# EAGLE board 2r51 (EAGLE 3.55), part 1 of 3
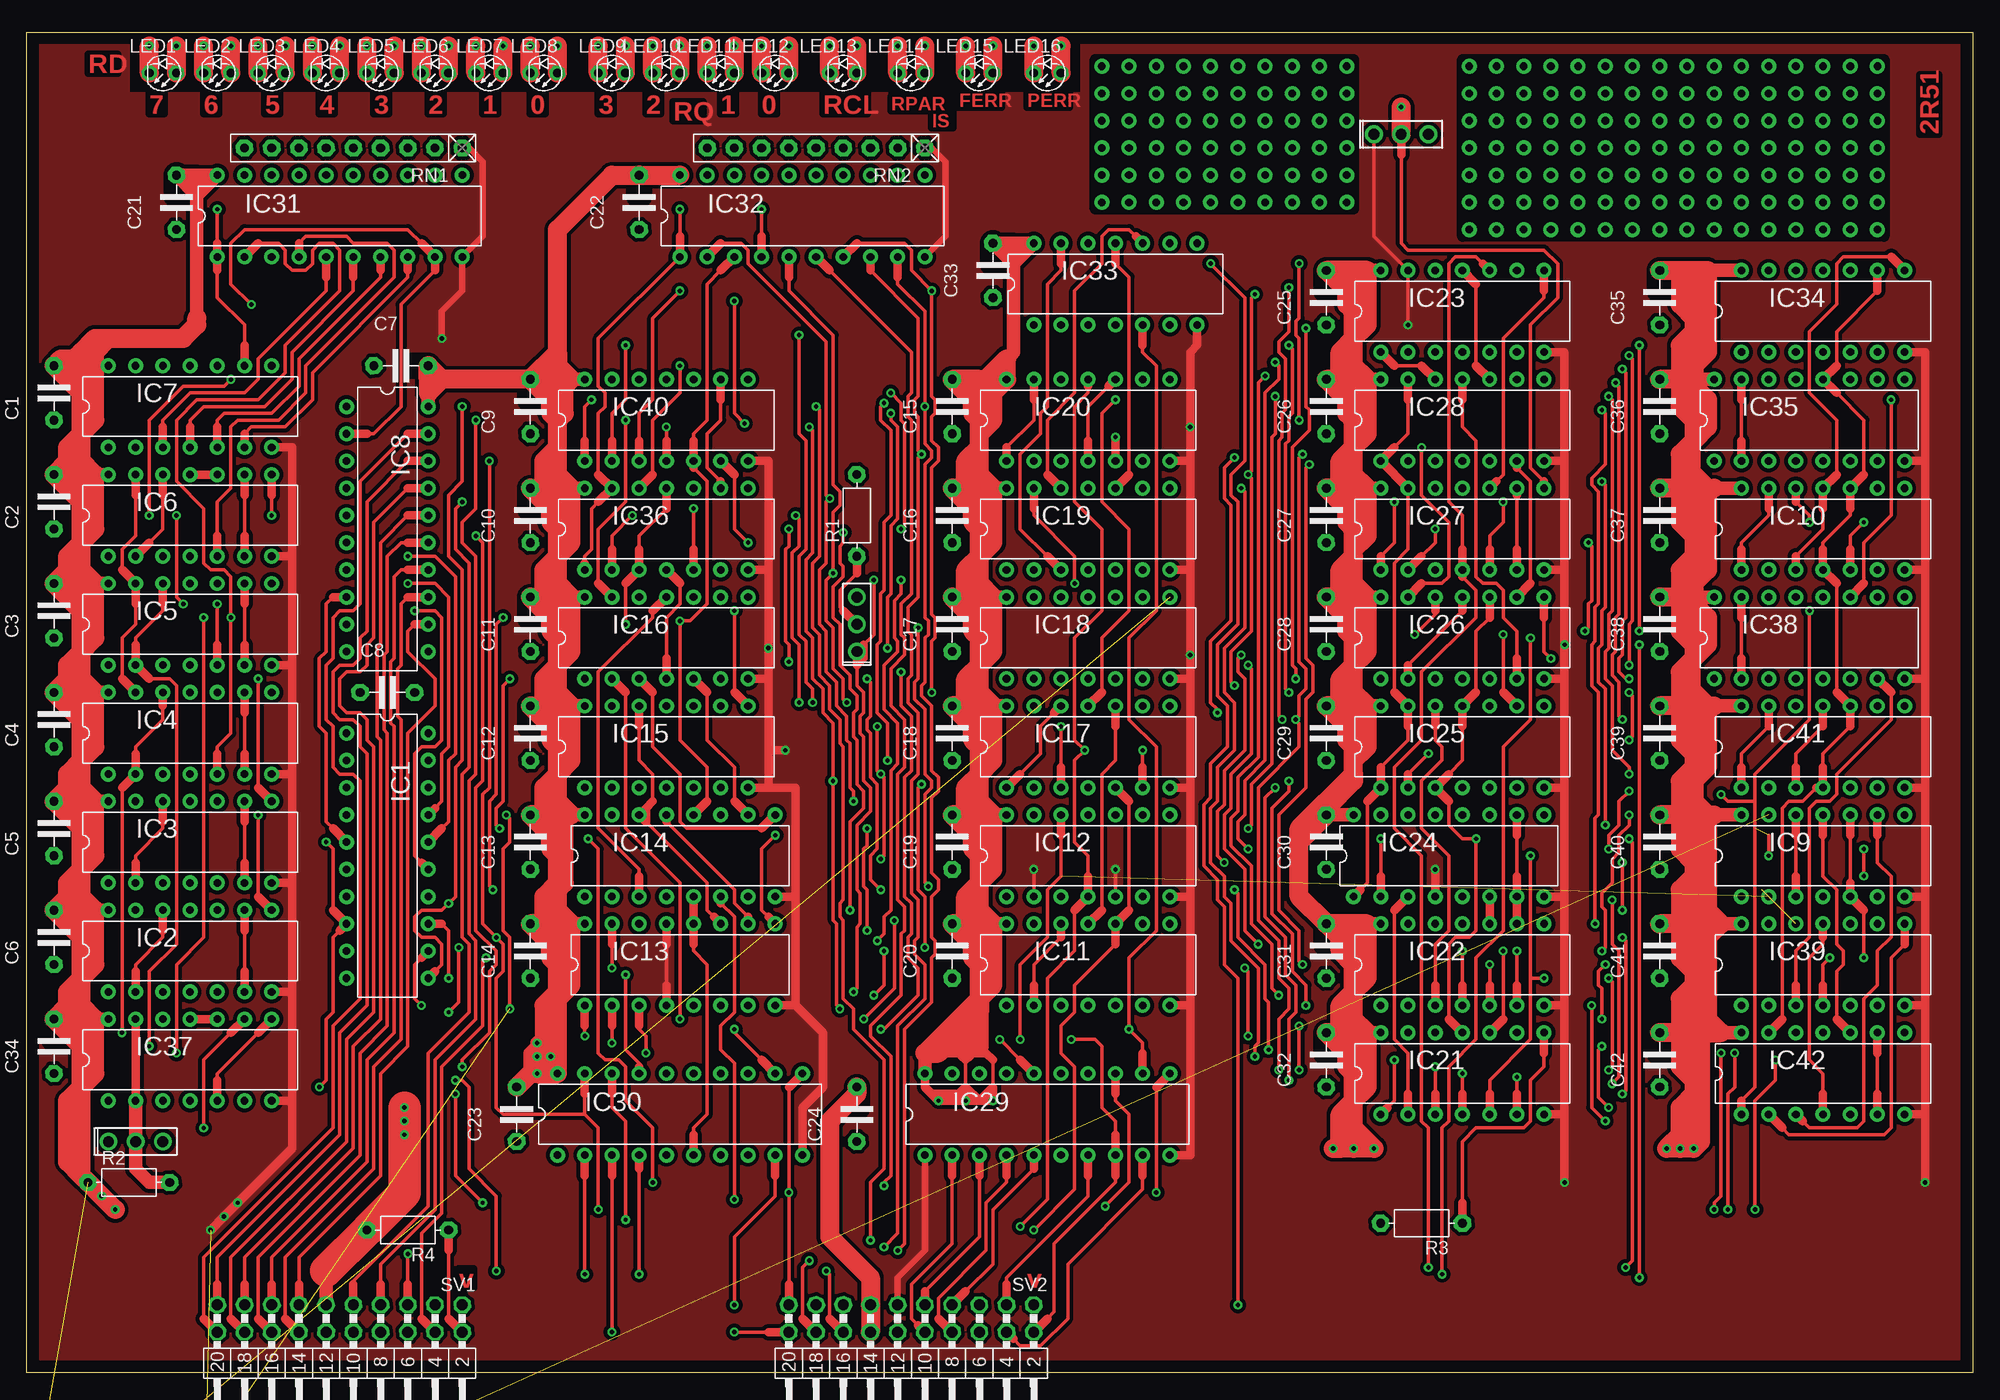
[diagram p0: board, top side]
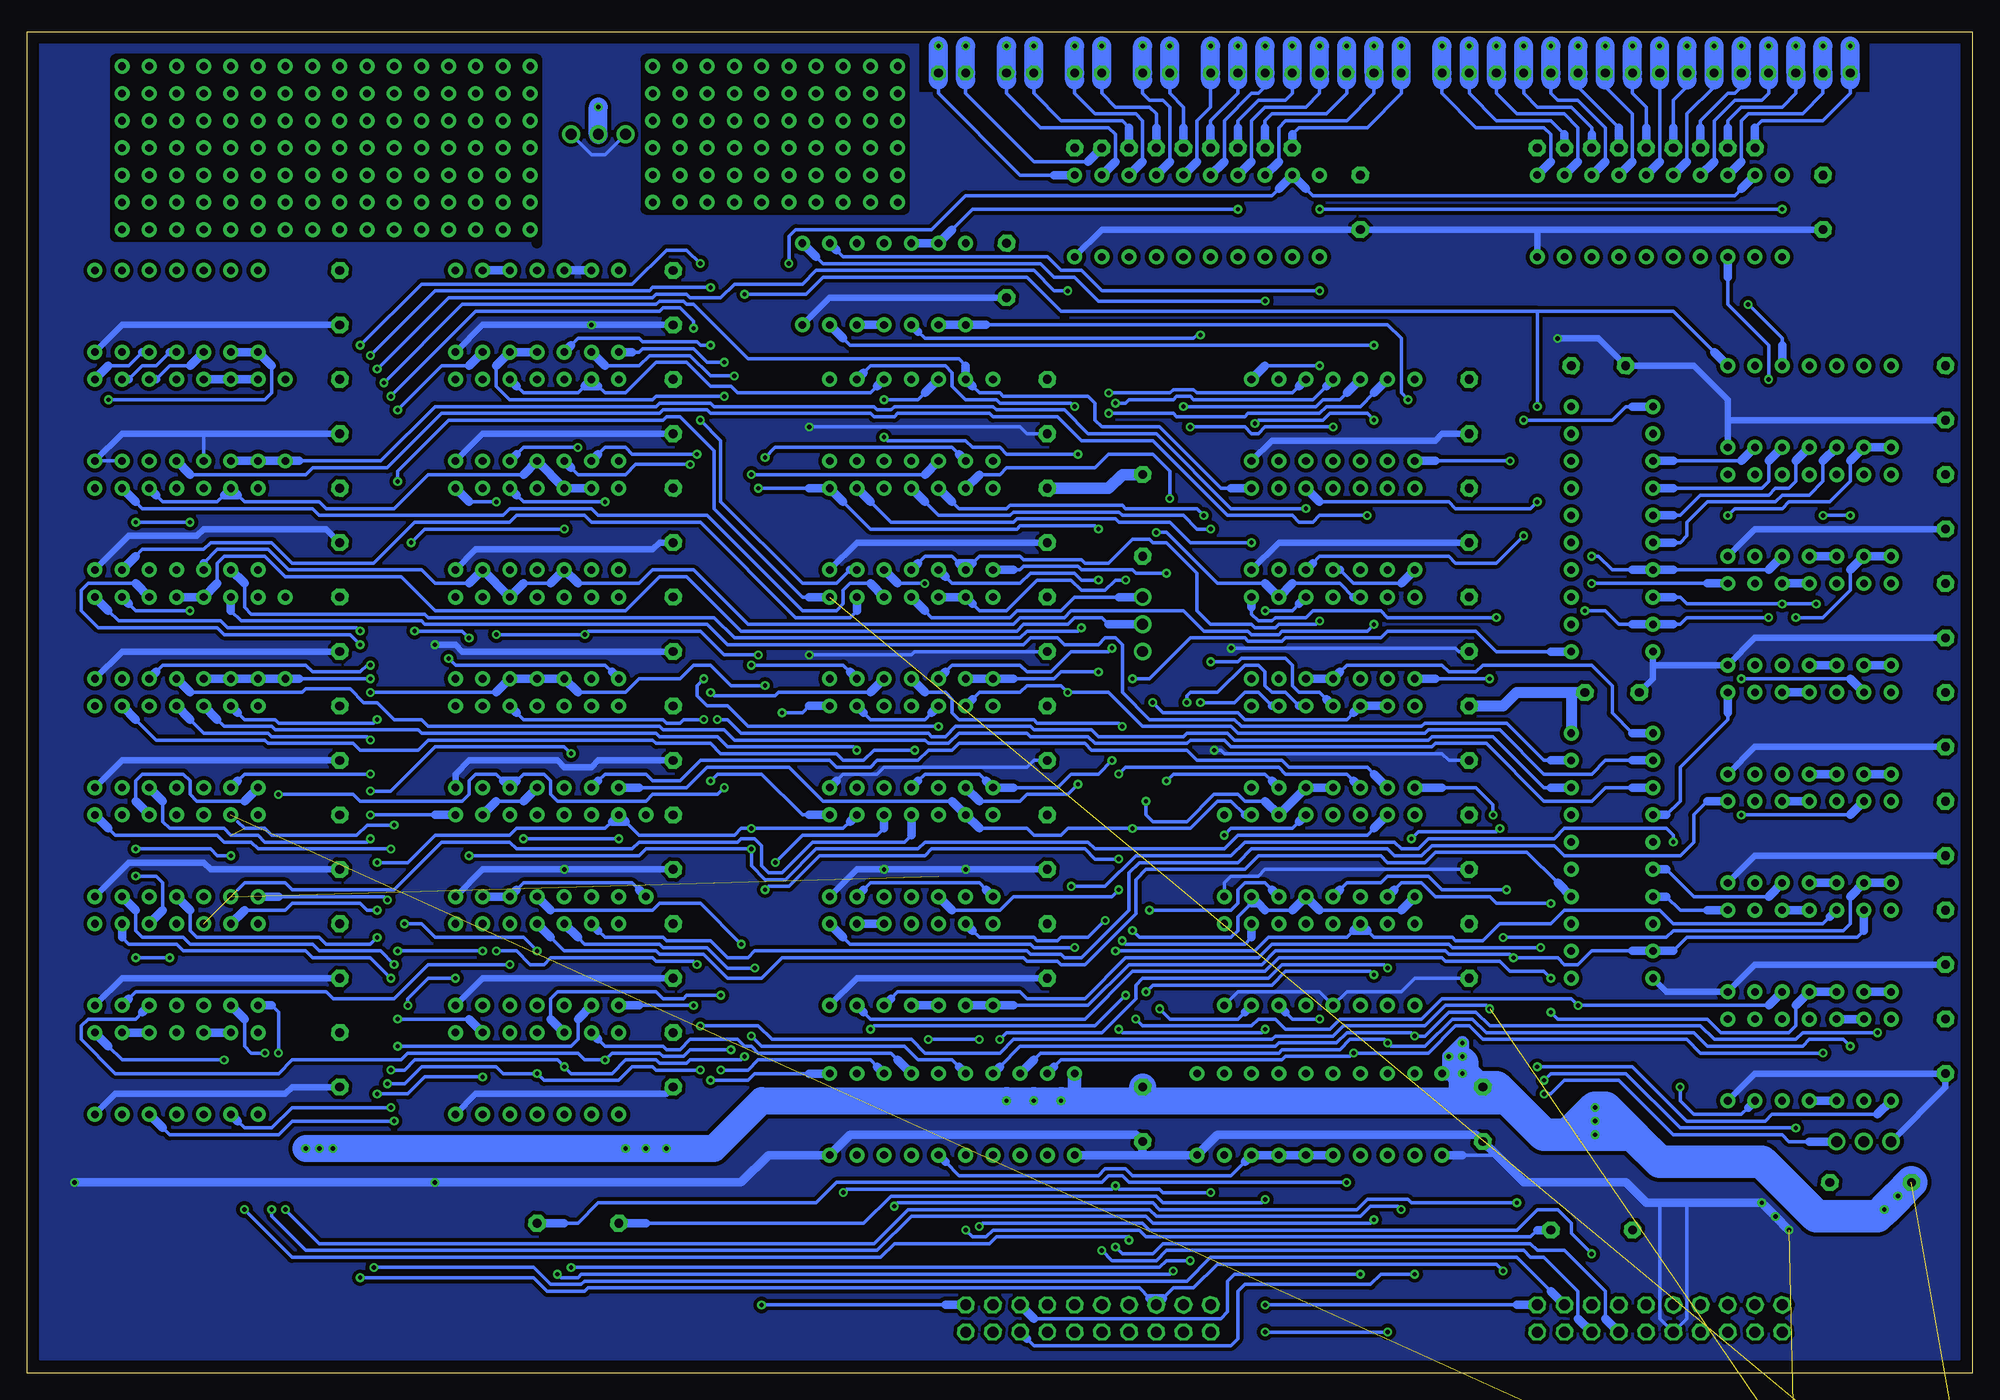
[diagram p1: board, bottom side, seen from below]

Size 181.61 x 125.09 mm. Coordinates in mm from the lower left corner, seen from the top.
Outline: 0,0 0,125.09 181.61,125.09 181.61,0 0,0
Copper layers used: Top, Bottom
tRestrict: 50 lines
bRestrict: 8 lines

## Footprints (pad centres in the part's own frame; a part is rotated, then mirrored left to right if it is on the bottom)
5 = drill 0.813 pad 1.6 octagon:  -2.54,0;  2.54,0
L20 = drill 0.711 pad 1.397 round:  -11.43,-3.81;  -8.89,-3.81;  -6.35,-3.81;  -3.81,-3.81;  -1.27,-3.81;  1.27,-3.81;  3.81,-3.81;  6.35,-3.81;  8.89,-3.81;  11.43,-3.81;  11.43,3.81;  8.89,3.81;  6.35,3.81;  3.81,3.81;  1.27,3.81;  -1.27,3.81;  -3.81,3.81;  -6.35,3.81;  -8.89,3.81;  -11.43,3.81
L14 = drill 0.711 pad 1.397 round:  -7.62,-3.81;  -5.08,-3.81;  -2.54,-3.81;  0,-3.81;  2.54,-3.81;  5.08,-3.81;  7.62,-3.81;  7.62,3.81;  5.08,3.81;  2.54,3.81;  0,3.81;  -2.54,3.81;  -5.08,3.81;  -7.62,3.81
L16 = drill 0.711 pad 1.397 round:  -8.89,-3.81;  -6.35,-3.81;  -3.81,-3.81;  -1.27,-3.81;  1.27,-3.81;  3.81,-3.81;  6.35,-3.81;  8.89,-3.81;  8.89,3.81;  6.35,3.81;  3.81,3.81;  1.27,3.81;  -1.27,3.81;  -3.81,3.81;  -6.35,3.81;  -8.89,3.81
L-3 = drill 1.016 pad 1.651 round:  0,0;  2.54,0;  -2.54,0
D-3S = drill 0.813 pad 1.397 octagon:  -1.27,0;  1.27,0
7,5 = drill 0.813 pad 1.6 octagon:  -3.81,0;  3.81,0
-9 = drill 0.813 pad 1.6 octagon:  -10.16,0;  -7.62,0;  -5.08,0;  -2.54,0;  0,0;  2.54,0;  5.08,0;  7.62,0;  10.16,0
10-2W = drill 1.016 pad 1.6 octagon:  11.43,1.27;  8.89,1.27;  6.35,1.27;  3.81,1.27;  1.27,1.27;  -1.27,1.27;  -3.81,1.27;  -6.35,1.27;  -8.89,1.27;  -11.43,1.27;  -11.43,-1.27;  -8.89,-1.27;  -6.35,-1.27;  -3.81,-1.27;  -1.27,-1.27;  1.27,-1.27;  3.81,-1.27;  6.35,-1.27;  8.89,-1.27;  11.43,-1.27

## Placement (x,y rotation side)
C1  100n  [5]  2.54,91.44 90 top
C2  100n  [5]  2.54,81.28 90 top
C3  100n  [5]  2.54,71.12 90 top
C4  100n  [5]  2.54,60.96 90 top
C5  100n  [5]  2.54,50.8 90 top
C6  100n  [5]  2.54,40.64 90 top
C7  100n  [5]  34.92,93.98 0 top
C8  100n  [5]  33.66,63.5 0 top
C9  100n  [5]  46.99,90.17 90 top
C10  100n  [5]  46.99,80.01 90 top
C11  100n  [5]  46.99,69.85 90 top
C12  100n  [5]  46.99,59.69 90 top
C13  100n  [5]  46.99,49.53 90 top
C14  100n  [5]  46.99,39.37 90 top
C15  100n  [5]  86.36,90.17 90 top
C16  100n  [5]  86.36,80.01 90 top
C17  100n  [5]  86.36,69.85 90 top
C18  100n  [5]  86.36,59.69 90 top
C19  100n  [5]  86.36,49.53 90 top
C20  100n  [5]  86.36,39.37 90 top
C21  100n  [5]  13.97,109.22 90 top
C22  100n  [5]  57.15,109.22 90 top
C23  100n  [5]  45.72,24.13 90 top
C24  100n  [5]  77.47,24.13 90 top
C25  100n  [5]  121.28,100.33 90 top
C26  100n  [5]  121.28,90.17 90 top
C27  100n  [5]  121.28,80.01 90 top
C28  100n  [5]  121.28,69.85 90 top
C29  100n  [5]  121.28,59.69 90 top
C30  100n  [5]  121.28,49.53 90 top
C31  100n  [5]  121.28,39.37 90 top
C32  100n  [5]  121.28,29.21 90 top
C33  100n  [5]  90.17,102.87 90 top
C34  100n  [5]  2.54,30.48 90 top
C35  100n  [5]  152.4,100.33 90 top
C36  100n  [5]  152.4,90.17 90 top
C37  100n  [5]  152.4,80.01 90 top
C38  100n  [5]  152.4,69.85 90 top
C39  100n  [5]  152.4,59.69 90 top
C40  100n  [5]  152.4,49.53 90 top
C41  100n  [5]  152.4,39.37 90 top
C42  100n  [5]  152.4,29.21 90 top
IC1  74273  [L20]  33.66,48.26 270 top
IC2  7400  [L14]  15.24,39.37 0 top
IC3  7400  [L14]  15.24,49.53 0 top
IC4  7400  [L14]  15.24,59.69 0 top
IC5  7400  [L14]  15.24,69.85 0 top
IC6  7400  [L14]  15.24,80.01 0 top
IC7  74164  [L14]  15.24,90.17 0 top
IC8  74574  [L20]  33.66,78.74 270 top
IC9  7410  [L14]  167.64,48.26 0 top
IC10  7474  [L14]  167.64,78.74 0 top
IC11  7400  [L14]  99.06,38.1 0 top
IC12  7486  [L14]  99.06,48.26 0 top
IC13  74151  [L16]  60.96,38.1 0 top
IC14  74163  [L16]  60.96,48.26 0 top
IC15  7400  [L14]  59.69,58.42 0 top
IC16  7408  [L14]  59.69,68.58 0 top
IC17  7408  [L14]  99.06,58.42 0 top
IC18  7400  [L14]  99.06,68.58 0 top
IC19  7410  [L14]  99.06,78.74 0 top
IC20  7474  [L14]  99.06,88.9 0 top
IC21  7404  [L14]  133.99,27.94 0 top
IC22  7408  [L14]  133.99,38.1 0 top
IC23  7400  [L14]  133.99,99.06 0 top
IC24  74163  [L16]  132.72,48.26 0 top
IC25  7474  [L14]  133.99,58.42 0 top
IC26  7400  [L14]  133.99,68.58 0 top
IC27  74125  [L14]  133.99,78.74 0 top
IC28  7474  [L14]  133.99,88.9 0 top
IC29  74573  [L20]  95.25,24.13 0 top
IC30  74573  [L20]  60.96,24.13 0 top
IC31  74245  [L20]  29.21,107.95 0 top
IC32  74245  [L20]  72.39,107.95 0 top
IC33  7400  [L14]  101.6,101.6 0 top
IC34  74164  [L14]  167.64,99.06 0 top
IC35  74151  [L16]  166.37,88.9 0 top
IC36  7474  [L14]  59.69,78.74 0 top
IC37  7400  [L14]  15.24,29.21 0 top
IC38  74151  [L16]  166.37,68.58 0 top
IC39  7432  [L14]  167.64,38.1 0 top
IC40  7408  [L14]  59.69,88.9 0 top
IC41  7474  [L14]  167.64,58.42 0 top
IC42  7400  [L14]  167.64,27.94 0 top
IC43  7400  [L14]  8.89,-11.43 0 top  (outside the outline)
J1  JUMPIII  [L-3]  77.47,69.85 90 top
J2  JUMPIII  [L-3]  128.27,115.57 0 top
J3  JUMPIII  [L-3]  10.16,21.59 0 top
LED1  LED-3S  [D-3S]  12.7,121.28 180 top
LED2  LED-3S  [D-3S]  17.78,121.28 180 top
LED3  LED-3S  [D-3S]  22.86,121.28 180 top
LED4  LED-3S  [D-3S]  27.94,121.28 180 top
LED5  LED-3S  [D-3S]  33.02,121.28 180 top
LED6  LED-3S  [D-3S]  38.1,121.28 180 top
LED7  LED-3S  [D-3S]  43.18,121.28 180 top
LED8  LED-3S  [D-3S]  48.26,121.28 180 top
LED9  LED-3S  [D-3S]  54.61,121.28 180 top
LED10  LED-3S  [D-3S]  59.69,121.28 180 top
LED11  LED-3S  [D-3S]  64.77,121.28 180 top
LED12  LED-3S  [D-3S]  69.85,121.28 180 top
LED13  LED-3S  [D-3S]  76.2,121.28 180 top
LED14  LED-3S  [D-3S]  82.55,121.28 180 top
LED15  LED-3S  [D-3S]  88.9,121.28 180 top
LED16  LED-3S  [D-3S]  95.25,121.28 180 top
R1  4k7  [7,5]  77.47,80.01 90 top
R2  4k7  [7,5]  9.53,17.78 0 top
R3  10  [7,5]  130.18,13.97 180 top
R4  4k7  [7,5]  35.56,13.34 180 top
RN1  330  [-9]  30.48,114.3 180 top
RN2  330  [-9]  73.66,114.3 180 top
SV1  MA10-2W  [10-2W]  29.21,5.08 180 top
SV2  MA10-2W  [10-2W]  82.55,5.08 180 top

## Library data of the parts
C1-C42 R1-R4 RN1 RN2 = DISCRETE
IC1-IC43 = 74XX
J1-J3 = jg
LED1-LED16 = M68XXX
SV1 SV2 = CON-LSTB

## Nets
1STOP: IC29. SV2.
-/RPARIS: IC1. IC38.
-RCL: IC9. IC15. IC25.
-RD4: IC6. IC7.
-RD5: IC1. IC5.
-RD6: IC1. IC4.
-RD7: IC1. IC22.
-RD7#: IC3. IC4. IC5. IC6. IC22.
-RPAR: IC1. IC2. IC3.
-RPARIS: IC1. IC38.
/15STOP: IC29. SV2.
/DISP: IC31. IC32. SV2.
/DTR: IC30. SV1.
/EDG1: IC9. IC43.
/EDGE: IC18. IC39. IC43.
/IS4: IC19. IC21. IC39. IC40.
/L4: IC16. IC21. R3.
/PARCHK: IC30. SV2.
/PAREN: IC30. SV2.
/R1STOP: IC2. IC11.
/R15STOP: IC21. IC29.
/RC: IC9. IC21.
/RCK: IC26. IC28.
/RCK16: IC21. IC28.
/RCS: IC23. IC27. SV2.
/RDR: IC8. SV1.
/RDTR: IC18. IC30.
/RES: IC36. SV1.
/RL: IC15. IC18. IC21. IC39.
/RPARCHK: IC30. IC39.
/RPAREN: IC3. IC30. IC33. IC39. IC40.
/RPARIS: IC1. IC38.
/RQ0: IC15. IC19.
/RQ1: IC19. IC33.
/RQ3: IC13. IC15. IC40.
/RRES: IC9. IC20. IC36. IC39. IC41.
/RWL5: IC6.
/RWL6: IC5.
/RWL7: IC4.
/RX1: IC25. IC28. IC29. J3.
/SML: IC14. IC16.
/V4: IC22. IC39. IC42.
/X1: IC9. IC12. IC29. SV2.
D0: IC8. SV1.
D1: IC8. SV1.
D2: IC8. SV1.
D3: IC8. SV1.
D4: IC8. SV1.
D5: IC8. SV1.
D6: IC8. SV1.
D7: IC8. SV1.
ETX1: IC1. IC11.
EXD: IC1. IC2. IC11. SV1.
F16: IC27. SV2.
FERR: IC20. IC32. SV1.
GND: C1. C2. C3. C4. C5. C6. C7. C8. C9. C10. C11. C12. C13. C14. C15. C16. C17. C18. C19. C20. C21. C22. C23. C24. C25. C26. C27. C28. C29. C30. C31. C32. C33. C34. C35. C36. C37. C38. C39. C40. C41. C42. IC1. IC2. IC3. IC4. IC5. IC6. IC7. IC8. IC9. IC10. IC11. IC12. IC13. IC14. IC15. IC16. IC17. IC18. IC19. IC20. IC21. IC22. IC23. IC24. IC25. IC26. IC27. IC28. IC29. IC30. IC31. IC32. IC33. IC34. IC35. IC36. IC37. IC38. IC39. IC40. IC41. IC42. IC43. J2. J3. RN1. RN2. SV1. SV2.
HI: IC1. IC7. IC10. IC12. IC13. IC14. IC16. IC20. IC22. IC23. IC24. IC25. IC27. IC28. IC29. IC30. IC31. IC32. IC34. IC35. IC36. IC41. IC42.
IS4: IC9. IC15. IC21. IC43.
N$1: IC4.
N$2: IC3.
N$3: IC2.
N$4: IC2.
N$5: IC3.
N$6: IC4.
N$7: IC5.
N$8: IC5.
N$9: IC6.
N$10: IC6.
N$11: IC11.
N$12: IC19. IC38.
N$13: IC33. IC40.
N$14: IC18. J1.
N$15: IC38. J1. R1.
N$16: IC38. IC39.
N$17: IC33. IC40.
N$18: IC15. IC33.
N$19: IC19. IC40.
N$20: IC17. IC20.
N$21: IC15. IC19. IC33.
N$22: IC10.
N$24: IC16. IC33.
N$25: IC15. IC16.
N$26: IC10. IC18.
N$27: IC10. IC18.
N$28: IC11. IC17.
N$30: IC17. IC41.
N$31: IC13. IC16.
N$32: IC9.
N$33: IC9. IC21.
N$34: IC21. IC24.
N$35: IC17. IC41.
N$36: IC11. IC17.
N$37: IC12.
N$38: IC22. IC24.
N$39: IC22. IC25.
N$40: IC36. IC40.
N$41: IC26.
N$42: IC26.
N$43: IC26. IC28.
N$44: IC26. IC28.
N$45: IC21. IC23.
N$46: IC18. IC40.
N$47: IC12. IC22.
N$48: IC31. LED1.
N$49: IC31. LED8.
N$50: IC31. LED2.
N$51: IC31. LED7.
N$52: IC31. LED3.
N$53: IC31. LED6.
N$54: IC31. LED5.
N$55: IC31. LED4.
N$56: LED5. RN1.
N$57: LED4. RN1.
N$58: LED3. RN1.
N$59: LED2. RN1.
N$60: LED1. RN1.
N$61: LED6. RN1.
N$62: LED7. RN1.
N$63: LED8. RN1.
N$64: IC32. LED9.
N$65: IC32. LED16.
N$66: IC32. LED10.
N$67: IC32. LED15.
N$68: IC32. LED11.
N$69: IC32. LED14.
N$70: IC32. LED13.
N$71: IC32. LED12.
N$72: LED13. RN2.
N$73: LED12. RN2.
N$74: LED11. RN2.
N$75: LED10. RN2.
N$76: LED9. RN2.
N$77: LED14. RN2.
N$78: LED15. RN2.
N$79: LED16. RN2.
N$112: IC34. IC35.
N$113: IC34. IC35.
N$114: IC34. IC35.
N$115: IC35. IC36. IC37.
N$116: IC35. IC36.
N$117: IC37.
N$118: IC37.
N$119: IC37.
N$120: IC37. J3. R2.
N$121: IC17. IC20.
N$122: IC22. IC23.
N$123: IC22. IC39.
N$124: IC18. IC24.
N$125: IC18. IC23.
N$126: IC9. IC42.
N$127: IC39. IC42.
N$128: IC9. IC42.
N$268: IC43.
PARSET: IC30. SV2.
PERR: IC20. IC32. SV1.
R1STOP: IC2. IC13. IC29. IC33.
RC: IC14. IC21. IC23. IC28. IC42.
RC16: IC12. IC23. IC24. IC39.
RC#: IC40. IC42.
RCK: IC1. IC7. IC14. IC20. IC26. IC41.
RCK1: IC12. IC25. IC26.
RCK16: IC10. IC21. IC24. IC25. IC26. IC27. IC34. IC36.
RCL: IC25. IC29. IC30. IC32. IC38. IC42. SV2.
RCS: IC23. IC27.
RD0: IC7. IC8. IC31.
RD1: IC7. IC8. IC31.
RD2: IC7. IC8. IC31.
RD3: IC7. IC8. IC31.
RD4: IC7. IC8. IC31.
RD5: IC1. IC6. IC8. IC31.
RD6: IC1. IC5. IC8. IC31.
RD7: IC1. IC4. IC8. IC31.
RDX: IC1. IC10. IC37.
RI0: IC14. IC16.
RI1: IC14. IC16.
RI3: IC14. IC16. R3.
RLD: IC12. IC20. IC41. SV1.
RLD+: IC8. IC12.
ROK: IC17. IC40.
RPAR: IC1. IC3.
RPAREN: IC3.
RPARIS: IC1. IC17. IC32. IC38.
RPARSET: IC18. IC30. J1.
RQ0: IC13. IC14. IC15. IC19. IC32.
RQ1: IC13. IC14. IC19. IC32. IC33.
RQ2: IC13. IC14. IC19. IC32. IC40.
RQ3: IC14. IC15. IC19. IC32.
RRDY: IC11. IC17. R4. SV1.
RRES: IC36. IC40.
RSTOPI: IC1. IC2. IC11.
RWL5: IC6. IC13. IC29.
RWL6: IC5. IC13. IC29.
RWL7: IC4. IC13. IC29.
RWL8: IC13. IC22. IC29.
RXD: IC34. IC37. IC38. SV2.
VCC: C1. C2. C3. C4. C5. C6. C7. C8. C9. C10. C11. C12. C13. C14. C15. C16. C17. C18. C19. C20. C21. C22. C23. C24. C25. C26. C27. C28. C29. C30. C31. C32. C33. C34. C35. C36. C37. C38. C39. C40. C41. C42. IC1. IC2. IC3. IC4. IC5. IC6. IC7. IC8. IC9. IC10. IC11. IC12. IC13. IC14. IC15. IC16. IC17. IC18. IC19. IC20. IC21. IC22. IC23. IC24. IC25. IC26. IC27. IC28. IC29. IC30. IC31. IC32. IC33. IC34. IC35. IC36. IC37. IC38. IC39. IC40. IC41. IC42. IC43. R1. R2. R4. SV1. SV2.
VCL: IC41. SV1.
WL5: IC29. SV2.
WL6: IC29. SV2.
WL7: IC29. SV2.
WL8: IC29. SV2.
X1: IC12. IC39.
XRCK16: IC27. J2.

## Tracks (layer width: path | path; a pad name or v marks a point on that pad's centre or on a via)
1STOP
  Top 0.305: 92.08,3.17 92.71,2.54 94.61,2.54 97.16,5.08 97.16,10.16 104.14,17.14 104.14,18.41
  Top 0.813: 104.14,18.41 104.14,20.32 | 91.44,3.81 92.08,3.17
-/RPARIS  (via drill 0.41 pad 0.81)
  Top 0.305: v149.54,66.04 149.54,69.85 149.86,70.17 149.86,94.61 v149.54,94.93 | v117.79,101.28 117.79,97.16 116.84,96.2 116.84,95.25 117.47,94.61 117.47,89.85 117.16,89.53 117.16,87.31 116.84,87 116.84,61.28 v117.16,60.96
  Bottom 0.305: 169.54,65.41 168.91,66.04 155.57,66.04 154.94,65.41 150.5,65.41 149.86,66.04 v149.54,66.04 | v149.54,94.93 143.51,100.97 123.51,100.97 123.19,101.28 v117.79,101.28 | 39.37,54.61 40.01,54.61 44.77,59.37 50.48,59.37 50.8,59.05 68.9,59.05 69.53,59.69 73.34,59.69 73.66,59.37 81.6,59.37 81.92,59.69 82.23,60.01 87.63,60.01 87.95,60.33 94.93,60.33 95.89,59.37 97.16,59.37 97.47,59.69 114.94,59.69 116.2,60.96 v117.16,60.96
  Bottom 0.813: 169.54,65.41 170.18,64.77 | 37.47,54.61 39.37,54.61
-RCL  (via drill 0.41 pad 0.81)
  Top 0.305: 128.91,55.88 v130.81,57.78 | v149.54,54.29 148.59,53.34 148.59,51.12 147.64,50.16 v147.64,48.9
  Top 0.813: 128.91,54.61 128.91,55.88
  Bottom 0.305: 173.99,50.8 173.35,50.16 163.83,50.16 163.19,49.53 160.66,49.53 160.02,48.9 v147.64,48.9 | 128.27,55.24 127.64,55.88 123.83,55.88 123.19,55.24 120.65,55.24 118.75,57.15 106.68,57.15 106.05,56.52 102.87,56.52 102.23,57.15 98.42,57.15 97.47,58.1 95.25,58.1 94.61,58.74 82.87,58.74 82.23,58.1 73.34,58.1 72.39,57.15 64.45,57.15 63.82,56.52 56.52,56.52 55.88,55.88 | v130.81,57.78 131.44,58.42 143.51,58.42 147.64,54.29 v149.54,54.29
  Bottom 0.813: 173.99,50.8 175.26,52.07 | 54.61,54.61 55.88,55.88 | 128.27,55.24 128.91,54.61
-RD4  (via drill 0.41 pad 0.81)
  Top 0.305: v22.86,80.01 22.86,81.92
  Top 0.813: 22.86,81.92 22.86,83.82
  Bottom 0.305: v22.86,80.01 22.23,80.64 17.78,80.64 17.14,81.28 13.34,81.28 11.43,83.19 11.43,85.09
  Bottom 0.813: 7.62,86.36 10.16,86.36 11.43,85.09
-RD5  (via drill 0.41 pad 0.81)
  Top 0.305: 38.1,52.7 38.73,53.34 38.73,57.78 39.37,58.42 39.37,72.39 38.1,73.66 v35.56,73.66
  Top 0.813: 37.47,52.07 38.1,52.7
  Bottom 0.305: v35.56,73.66 24.77,73.66
  Bottom 0.813: 24.77,73.66 22.86,73.66
-RD6
  Bottom 0.305: 28.57,52.07 27.3,53.34 27.3,56.52 22.86,60.96 22.86,61.59
  Bottom 0.813: 29.84,52.07 28.57,52.07 | 22.86,61.59 22.86,63.5
-RD7
  Bottom 0.305: 132.72,40.64 131.44,39.37 122.87,39.37 122.56,39.05 118.43,39.05 116.2,36.83 113.03,36.83 111.12,38.73 88.58,38.73 88.27,38.42 85.41,38.42 85.09,38.1 82.87,38.1 78.11,42.86 78.11,46.04 77.15,46.99 67.94,46.99 66.67,48.26 55.24,48.26 54.61,47.62 51.12,47.62 50.16,48.58 41.59,48.58 38.73,45.72
  Bottom 0.813: 37.47,44.45 38.73,45.72 | 132.72,40.64 133.99,41.91
-RD7#  (via drill 0.41 pad 0.81)
  Top 0.305: 10.16,81.92 10.16,78.11 8.89,76.83 8.89,74.93 | 10.16,71.75 10.16,69.85 8.89,68.58 8.89,64.77 | v21.59,64.77 21.59,54.61
  Top 0.813: 21.59,54.61 22.86,53.34 | 8.89,64.77 10.16,63.5 | 8.89,74.93 10.16,73.66 10.16,71.75 | 10.16,81.92 10.16,83.82
  Bottom 0.305: 128.27,41.27 127.64,40.64 122.24,40.64 121.92,40.32 117.79,40.32 116.2,38.73 114.3,38.73 113.67,39.37 88.27,39.37 87.95,39.05 85.09,39.05 84.77,38.73 83.19,38.73 78.74,43.18 78.74,46.67 77.79,47.62 68.58,47.62 67.31,48.9 54.61,48.9 53.98,48.26 51.44,48.26 50.48,49.21 39.05,49.21 38.1,48.26 27.3,48.26 26.04,49.53 26.04,52.07 24.77,53.34 | 11.43,64.77 v21.59,64.77
  Bottom 0.813: 22.86,53.34 24.77,53.34 | 10.16,63.5 11.43,64.77 | 128.27,41.27 128.91,41.91
-RPAR  (via drill 0.41 pad 0.81)
  Top 0.305: v21.59,52.07 21.59,44.45
  Top 0.813: 21.59,44.45 22.86,43.18
  Bottom 0.305: 11.43,52.07 v21.59,52.07 | 28.57,44.45 27.3,43.18 24.77,43.18
  Bottom 0.813: 22.86,43.18 24.77,43.18 | 28.57,44.45 29.84,44.45 | 11.43,52.07 10.16,53.34
-RPARIS
  Bottom 0.305: 166.37,63.5 155.89,63.5 155.57,63.82 151.45,63.82 150.18,62.55 148.91,62.55 147.32,60.96 144.78,60.96 144.15,60.33 122.56,60.33 122.24,60.01 116.52,60.01 115.57,59.05 97.79,59.05 97.47,58.74 95.57,58.74 94.61,59.69 88.27,59.69 87.95,59.37 82.55,59.37 81.92,58.74 73.34,58.74 73.03,59.05 69.85,59.05 69.22,58.42 50.48,58.42 50.16,58.74 45.4,58.74 40.01,53.34 35.56,53.34 34.29,54.61 31.75,54.61
  Bottom 0.813: 166.37,63.5 167.64,64.77 | 29.84,54.61 31.75,54.61
/15STOP
  Top 0.305: 91.44,8.26 91.44,8.89 99.06,16.51 99.06,18.41
  Top 0.813: 99.06,18.41 99.06,20.32 | 91.44,6.35 91.44,8.26
/DISP  (via drill 0.41 pad 0.81)
  Top 0.305: v113.03,6.35 113.03,36.83 111.76,38.1 111.76,43.5 111.12,44.13 111.12,46.04 109.86,47.31 109.86,53.02 110.49,53.66 110.49,56.83 112.08,58.42 112.08,62.23 111.12,63.18 111.12,67.94 113.03,69.85 113.03,81.28 112.39,81.92 112.39,83.82 113.67,85.09 113.67,100.33 v110.49,103.5
  Bottom 0.305: 62.23,110.49 61.59,109.86 22.23,109.86 21.59,110.49 | 95.89,6.35 v113.03,6.35 | v110.49,103.5 110.49,106.05 109.86,106.68 97.16,106.68 93.98,109.86 65.41,109.86 64.77,110.49
  Bottom 0.813: 62.23,110.49 63.5,111.76 64.77,110.49 | 21.59,110.49 20.32,111.76 | 93.98,6.35 95.89,6.35
/DTR  (via drill 0.41 pad 0.81)
  Top 0.305: 69.85,18.41 69.85,16.51 66.04,12.7 v66.04,6.35
  Top 0.813: 69.85,18.41 69.85,20.32
  Bottom 0.305: 42.55,6.35 v66.04,6.35
  Bottom 0.813: 40.64,6.35 42.55,6.35
/EDG1  (2 unrouted)
/EDGE  (via drill 0.41 pad 0.81)  (2 unrouted)
  Top 0.305: v162.56,48.26 162.56,50.16 | v171.45,46.35 v171.45,48.9 | v147.32,51.12 147.32,63.82 146.69,64.45 146.69,67.63 147,67.94 147,71.12 147.32,71.44 147.32,82.87 v147,83.19
  Bottom 0.305: 161.93,51.44 161.29,50.8 159.38,50.8 158.75,50.16 150.81,50.16 149.86,51.12 v147.32,51.12 | v162.56,48.26 163.83,48.26 164.47,48.9 v171.45,48.9 | 168.91,43.18 168.91,45.72 169.54,46.35 v171.45,46.35 | v147,83.19 147,84.14 142.24,88.9 122.24,88.9 121.92,89.22 120.65,89.22 117.47,86.04 117.47,80.64 109.22,72.39 108.58,72.39
  Bottom 0.813: 170.18,41.91 168.91,43.18 | 106.68,72.39 108.58,72.39
/IS4  (via drill 0.41 pad 0.81)
  Top 0.305: v131.44,28.57 131.44,26.04 | v147.64,28.26 147.96,28.57 147.96,36.51 v147.64,36.83 | v113.35,82.55 113.67,82.23 113.67,69.53 111.76,67.63 111.76,63.5 112.71,62.55 112.71,58.1 111.12,56.52 111.12,53.34 110.49,52.7 110.49,47.62 111.76,46.35 111.76,44.45 112.39,43.81 112.39,40.32 114.94,37.78 114.94,30.8 114.62,30.48 v114.62,29.53 | v81.6,78.74 81.92,79.06 81.92,88.58 81.6,88.9 81.6,90.49 v80.64,91.44
  Top 0.813: 131.44,26.04 131.44,24.13
  Bottom 0.305: 172.72,40.64 172.09,40.01 167.64,40.01 167,39.37 155.57,39.37 154.94,38.73 149.54,38.73 v147.64,36.83 | v147.64,28.26 146.37,28.26 145.41,29.21 132.08,29.21 v131.44,28.57 130.81,27.94 127,27.94 125.73,29.21 122.87,29.21 122.56,28.89 120.02,28.89 119.7,29.21 114.94,29.21 v114.62,29.53 | 105.41,81.28 102.87,78.74 89.22,78.74 88.9,79.06 81.92,79.06 v81.6,78.74 | v113.35,82.55 108.58,82.55 | 62.87,92.08 63.5,91.44 72.39,91.44 72.71,91.76 74.61,91.76 74.93,91.44 v80.64,91.44
  Bottom 0.813: 172.72,40.64 172.72,41.91 | 62.87,92.08 62.23,92.71 | 105.41,81.28 106.68,82.55 108.58,82.55
/L4  (via drill 0.41 pad 0.81)
  Top 0.305: 141.6,29.84 141.6,28.57 140.34,27.3 140.34,23.5 139.7,22.86 135.25,22.86 133.99,21.59 133.99,15.88 | v58.42,17.78 58.42,22.86 55.88,25.4 55.88,28.57 55.24,29.21 53.98,29.21 53.34,29.84 53.34,48.9 v52.39,49.85 | v44.13,50.8 43.81,51.12 43.81,52.7 44.45,53.34 44.45,64.14 v45.09,64.77
  Top 0.813: 141.6,29.84 141.6,31.75 | 133.99,13.97 133.99,15.88
  Bottom 0.305: 131.44,13.97 130.18,13.97 128.27,15.88 107.95,15.88 106.05,17.78 81.28,17.78 80.64,18.41 79.38,18.41 78.74,17.78 v58.42,17.78 | v45.09,64.77 50.16,64.77 | v52.39,49.85 51.75,50.48 44.45,50.48 v44.13,50.8
  Bottom 0.813: 50.16,64.77 52.07,64.77 | 131.44,13.97 133.99,13.97
/PARCHK  (via drill 0.41 pad 0.81)
  Top 0.305: v66.04,3.81 69.22,3.81 | v54.61,3.81 54.61,18.41
  Top 0.813: 54.61,18.41 54.61,20.32 | 69.22,3.81 71.12,3.81
  Bottom 0.305: v54.61,3.81 v66.04,3.81
/PAREN  (via drill 0.41 pad 0.81)
  Top 0.305: v52.07,9.21 52.07,18.41
  Top 0.813: 52.07,18.41 52.07,20.32
  Bottom 0.305: v52.07,9.21 55.24,9.21 56.2,8.26 67.94,8.26 68.58,7.62 68.58,3.17 69.22,2.54 87.63,2.54 88.27,3.17
  Bottom 0.813: 88.27,3.17 88.9,3.81
/R1STOP  (via drill 0.41 pad 0.81)
  Top 0.305: v39.37,33.66 40.32,34.61 v40.32,39.69
  Bottom 0.305: 100.97,34.92 100.33,35.56 88.9,35.56 88.27,34.92 82.87,34.92 79.06,38.73 66.67,38.73 65.41,40.01 48.9,40.01 48.58,39.69 v40.32,39.69 | 16.51,34.29 16.51,32.38 17.14,31.75 23.5,31.75 24.77,33.02 38.73,33.02 v39.37,33.66
  Bottom 0.813: 12.7,35.56 15.24,35.56 16.51,34.29 | 100.97,34.92 101.6,34.29
/R15STOP
  Bottom 0.305: 128.27,31.11 127.64,30.48 122.24,30.48 121.92,30.16 120.65,30.16 119.7,31.11 115.25,31.11 114.62,30.48 113.98,30.48 113.35,29.84 100.97,29.84 100.33,29.21
  Bottom 0.813: 99.06,27.94 100.33,29.21 | 128.27,31.11 128.91,31.75
/RC  (via drill 0.41 pad 0.81)
  Top 0.305: 139.06,26.04 v139.06,27.62 | v148.91,26.04 149.22,26.35 149.22,40.32 v148.91,40.64
  Top 0.813: 139.06,24.13 139.06,26.04
  Bottom 0.305: 166.37,43.18 166.37,41.27 165.74,40.64 154.31,40.64 153.67,40.01 149.54,40.01 v148.91,40.64 | v139.06,27.62 144.46,27.62 146.05,26.04 v148.91,26.04
  Bottom 0.813: 166.37,43.18 167.64,44.45
/RCK
  Top 0.305: 139.06,66.67 139.06,69.22 137.79,70.48 137.79,73.03 137.16,73.66 135.89,73.66 135.25,74.3 135.25,87 133.99,88.27 133.99,90.81
  Top 0.813: 133.99,90.81 133.99,92.71 | 139.06,64.77 139.06,66.67
/RCK16  (via drill 0.41 pad 0.81)
  Top 0.305: v137.79,39.37 137.79,33.02 | v119.7,84.77 119.38,84.45 119.38,66.67 120.02,66.04 120.02,63.5 119.38,62.87 119.38,54.61 116.84,52.07 116.84,43.18 118.75,41.27 118.75,38.42 v119.06,38.1
  Top 0.813: 137.79,33.02 136.53,31.75
  Bottom 0.305: 130.81,84.45 130.18,83.82 125.73,83.82 124.78,84.77 v119.7,84.77 | v137.79,39.37 135.89,39.37 134.62,38.1 133.35,38.1 132.72,38.73 123.19,38.73 122.87,38.42 119.38,38.42 v119.06,38.1
  Bottom 0.813: 130.81,84.45 131.44,85.09
/RCS  (via drill 0.41 pad 0.81)
  Top 0.305: 133.99,76.83 133.99,80.01 132.72,81.28 132.72,103.5 133.35,104.14 135.25,104.14 135.89,103.5 | 72.39,5.08 72.39,9.84 v73.03,10.48 | 133.99,74.3 135.25,73.03 135.25,70.48 130.18,65.41 130.18,59.05 127.64,56.52 127.64,50.8 130.18,48.26 130.18,23.5 130.81,22.86 v130.81,9.84
  Top 0.813: 73.66,3.81 72.39,5.08 | 135.89,103.5 136.53,102.87 | 133.99,76.83 133.99,74.93 133.99,74.3
  Bottom 0.305: 136.53,102.87 139.06,102.87 | v73.03,10.48 75.25,10.48 75.88,9.84 v130.81,9.84
  Bottom 0.813: 136.53,102.87 139.06,102.87
/RDR  (via drill 0.41 pad 0.81)
  Top 0.305: 33.02,8.26 33.02,10.16 38.1,15.24 38.1,29.21 41.91,33.02 41.91,40.32 41.27,40.96 41.27,55.24 41.91,55.88 41.91,76.2 40.64,77.47 40.64,79.38 41.91,80.64 v41.91,88.9
  Top 0.813: 33.02,6.35 33.02,8.26
  Bottom 0.305: v41.91,88.9 33.66,88.9 32.38,90.17 31.75,90.17
  Bottom 0.813: 31.75,90.17 29.84,90.17
/RDTR  (via drill 0.41 pad 0.81)
  Top 0.305: v81.6,65.41 81.6,62.23 82.55,61.28 82.55,56.2 81.92,55.56 81.92,44.45 82.55,43.81 82.55,40.96 82.23,40.64 82.23,38.73 83.19,37.78 83.19,35.24 80.01,32.07 v79.69,32.07 | 68.58,29.21 66.04,31.75 v66.04,32.07
  Top 0.813: 69.85,27.94 68.58,29.21
  Bottom 0.305: 91.44,64.77 93.98,64.77 | v81.6,65.41 85.09,65.41 85.72,64.77 89.53,64.77 | v66.04,32.07 66.36,31.75 79.38,31.75 v79.69,32.07
  Bottom 0.813: 93.98,64.77 91.44,64.77 89.53,64.77
/RES  (via drill 0.41 pad 0.81)
  Top 0.305: 30.48,8.26 30.48,8.57 37.47,15.56 37.47,29.84 41.27,33.66 41.27,40.01 40.64,40.64 40.64,55.88 41.27,56.52 41.27,75.56 40.01,76.83 40.01,80.64 v40.64,81.28
  Top 0.813: 30.48,6.35 30.48,8.26
  Bottom 0.305: v40.64,81.28 41.27,80.64 48.26,80.64 48.9,81.28 60.96,81.28
  Bottom 0.813: 60.96,81.28 62.23,82.55
/RL  (via drill 0.41 pad 0.81)
  Top 0.305: 127,24.77 127.64,25.4 v127.64,29.21 | v79.38,60.33 79.38,56.2 v79.69,55.88 80.01,55.56 80.01,48.26 v79.69,47.94 | v115.89,30.16 115.89,34.61 115.57,34.92 115.57,38.1 113.03,40.64 113.03,44.77 v112.71,45.09
  Top 0.813: 127,24.77 126.36,24.13
  Bottom 0.305: 170.81,33.66 171.45,33.02 175.9,33.02 176.53,32.38 176.53,31.11 173.35,27.94 158.12,27.94 156.84,29.21 146.69,29.21 146.05,29.84 130.18,29.84 129.54,29.21 v127.64,29.21 127,29.84 122.56,29.84 122.24,29.53 120.33,29.53 119.7,30.16 v115.89,30.16 | 97.79,63.5 95.89,63.5 95.25,62.87 95.25,61.59 94.61,60.96 87.63,60.96 87.31,60.64 79.69,60.64 v79.38,60.33 | 57.78,55.24 58.42,55.88 64.14,55.88 64.77,56.52 79.06,56.52 v79.69,55.88 | v79.69,47.94 81.92,47.94 82.87,48.9 97.16,48.9 97.79,48.26 107.63,48.26 110.49,45.4 112.39,45.4 v112.71,45.09
  Bottom 0.813: 170.81,33.66 170.18,34.29 | 57.15,54.61 57.78,55.24 | 97.79,63.5 99.06,64.77
/RPARCHK  (via drill 0.41 pad 0.81)
  Top 0.305: v159.38,29.84 159.38,26.67 158.75,26.04 v158.75,15.24 | v55.88,14.29 55.88,23.5 54.61,24.77 54.61,26.04
  Top 0.813: 54.61,26.04 54.61,27.94
  Bottom 0.305: 161.29,33.02 161.29,30.48 160.66,29.84 v159.38,29.84 | v158.75,15.24 158.75,14.61 155.57,11.43 102.23,11.43 99.06,14.61 77.15,14.61 76.52,13.97 56.2,13.97 v55.88,14.29
  Bottom 0.813: 161.29,33.02 162.56,34.29
/RPAREN  (via drill 0.41 pad 0.81)
  Top 0.305: 10.16,47.62 10.16,48.26 12.7,50.8 12.7,51.44 | v158.12,29.84 158.12,16.51 157.48,15.88 v157.48,15.24 | v53.34,15.24 53.34,22.86 52.07,24.13 | 52.07,24.13 52.07,26.04 | 52.07,87 52.07,90.17 v52.7,90.81 | v43.18,85.09 43.18,54.61 42.55,53.98 42.55,41.91 v43.81,40.64 44.45,40.01 44.45,37.47 43.81,36.83 43.81,24.77 44.45,24.13 52.07,24.13
  Top 0.813: 10.16,45.72 10.16,47.62 | 12.7,51.44 12.7,53.34 | 52.07,85.09 52.07,87 | 52.07,26.04 52.07,27.94
  Bottom 0.305: 11.43,44.45 11.43,41.91 12.06,41.27 27.94,41.27 28.57,40.64 v43.81,40.64 | 93.98,97.79 96.52,97.79 | 158.75,34.29 158.12,33.66 v158.12,29.84 | v157.48,15.24 154.31,12.06 102.55,12.06 99.38,15.24 76.83,15.24 76.2,14.61 57.15,14.61 56.2,15.56 53.66,15.56 v53.34,15.24 | v52.7,90.81 53.34,91.44 53.34,96.52 54.61,97.79 92.08,97.79 | v43.18,85.09 50.16,85.09
  Bottom 0.813: 7.62,45.72 10.16,45.72 11.43,44.45 | 158.75,34.29 160.02,34.29 | 50.16,85.09 52.07,85.09 | 96.52,97.79 93.98,97.79 92.08,97.79
/RPARIS
  Bottom 0.305: 39.37,57.15 40.01,57.15 43.5,60.64 51.12,60.64 51.44,60.33 68.26,60.33 68.9,60.96 76.83,60.96 79.38,63.5 79.38,67.94 80.01,68.58 80.96,68.58 81.6,67.94 84.77,67.94 85.41,68.58 87.95,68.58 88.58,67.94 116.2,67.94 118.11,69.85 144.46,69.85 144.78,70.17 161.61,70.17 162.56,71.12
  Bottom 0.813: 162.56,71.12 162.56,72.39 | 37.47,57.15 39.37,57.15
/RQ0  (via drill 0.41 pad 0.81)
  Top 0.305: v71.12,66.36 71.12,67.94 70.8,68.26 70.8,76.83 71.12,77.15 v71.12,78.74
  Bottom 0.305: 97.79,81.28 96.52,80.01 89.85,80.01 89.53,80.33 79.69,80.33 79.38,80.01 73.66,80.01 72.39,78.74 v71.12,78.74 | 60.33,62.87 60.96,63.5 62.87,63.5 63.5,64.14 63.5,66.04 64.14,66.67 68.26,66.67 68.58,66.36 v71.12,66.36
  Bottom 0.813: 59.69,62.23 60.33,62.87 | 97.79,81.28 99.06,82.55
/RQ1
  Top 0.305: 101.6,103.5 102.87,102.23 102.87,83.82
  Top 0.813: 101.6,82.55 102.87,83.82 | 101.6,103.5 101.6,105.41
/RQ3  (via drill 0.41 pad 0.81)
  Top 0.305: v75.88,33.97 75.56,34.29 75.56,41.91 75.25,42.23 v75.25,55.24 75.25,60.64 74.3,61.59 74.3,63.82 73.34,64.77 73.34,68.58 72.71,69.22 72.71,75.88 73.34,76.52 73.34,87.95 v73.03,88.27 | v59.69,88.27 59.69,87
  Top 0.813: 59.69,87 59.69,85.09
  Bottom 0.305: 67.94,33.66 68.58,33.02 74.93,33.02 v75.88,33.97 | 65.41,55.24 66.04,55.88 74.61,55.88 v75.25,55.24 | v73.03,88.27 67.94,88.27 67.31,87.63 66.67,87.63 66.04,88.27 v59.69,88.27
  Bottom 0.813: 65.41,55.24 64.77,54.61 | 67.31,34.29 67.94,33.66
/RRES  (via drill 0.41 pad 0.81)
  Top 0.305: 160.02,56.52 160.02,57.78 162.56,60.33 | 170.18,50.16 170.18,45.72 | 167.64,36.2 167.64,38.1 v168.28,38.73 | 171.45,43.18 v171.45,38.73 | 91.44,86.36 93.98,88.9 93.98,90.81 | v148.91,60.96 148.59,61.28 148.59,64.45 147.96,65.09 147.96,66.99 148.27,67.31 148.27,70.48 148.59,70.8 148.59,92.08 v148.27,92.39
  Top 0.813: 167.64,36.2 167.64,34.29 | 171.45,43.18 170.18,44.45 170.18,45.72 | 170.18,52.07 170.18,50.16 | 160.02,56.52 160.02,54.61 | 162.56,62.23 162.56,60.33 | 93.98,92.71 93.98,90.81 | 91.44,86.36 91.44,85.09
  Bottom 0.305: v171.45,38.73 v168.28,38.73 | 161.29,53.34 165.74,53.34 166.37,53.98 166.37,55.24 167,55.88 170.81,55.88 171.45,55.24 171.45,53.34 | 161.93,61.59 161.29,60.96 158.43,60.96 158.12,60.64 149.22,60.64 v148.91,60.96 | v148.27,92.39 140.97,99.69 122.87,99.69 122.56,100.01 120.33,100.01 120.02,99.69 119.38,99.69 114.3,94.61 94.61,94.61 93.98,93.98 | 93.34,92.08 92.71,91.44 90.81,91.44 90.49,91.12 82.55,91.12 81.92,90.49 81.92,88.9 81.28,88.27 75.88,88.27 70.17,82.55 69.22,82.55
  Bottom 0.813: 161.93,61.59 162.56,62.23 | 171.45,53.34 170.18,52.07 | 160.02,54.61 161.29,53.34 | 67.31,82.55 69.22,82.55 | 93.98,93.98 93.98,92.71 93.34,92.08
/RWL5
  Bottom 0.813: 12.7,76.2 15.24,76.2
/RWL6
  Bottom 0.813: 12.7,66.04 15.24,66.04
/RWL7
  Bottom 0.813: 12.7,55.88 15.24,55.88
/RX1  (via drill 0.41 pad 0.81)
  Top 0.305: v119.06,85.72 118.75,85.41 118.75,66.36 119.38,65.72 119.38,63.82 118.75,63.18 118.75,61.28 v118.43,60.96 118.75,60.64 118.75,58.42 114.94,54.61 114.94,42.23 116.84,40.32 116.84,36.83 117.79,35.88 117.79,33.97 116.84,33.02 v116.84,28.26 | 101.6,26.04 101.6,25.4 102.87,24.13 102.87,17.78 v100.65,15.56 | v42.55,15.88 40.01,18.41 v40.01,26.04
  Top 0.813: 101.6,26.04 101.6,27.94
  Bottom 0.305: 135.89,61.59 135.25,60.96 122.24,60.96 121.92,60.64 120.65,60.64 120.33,60.96 v118.43,60.96 | 128.27,85.72 127.64,86.36 125.73,86.36 125.09,85.72 v119.06,85.72 | 102.23,28.57 102.87,29.21 113.35,29.21 114.3,28.26 v116.84,28.26 | 15.24,21.59 17.14,21.59 17.78,22.23 27.94,22.23 33.02,27.3 38.1,27.3 39.37,26.04 v40.01,26.04 | v42.55,15.88 52.39,15.88 52.7,16.19 56.52,16.19 57.47,15.24 75.88,15.24 76.52,15.88 100.33,15.88 v100.65,15.56
  Bottom 0.813: 12.7,21.59 15.24,21.59 | 101.6,27.94 102.23,28.57 | 135.89,61.59 136.53,62.23 | 128.27,85.72 128.91,85.09
/SML
  Top 0.305: 58.42,63.5 58.42,58.42 60.96,55.88 60.96,51.44 61.59,50.8 68.58,50.8
  Top 0.813: 58.42,63.5 57.15,64.77 | 68.58,50.8 69.85,52.07
/V4  (via drill 0.41 pad 0.81)
  Top 0.305: 175.26,40.01 173.99,38.73 173.99,22.86 173.35,22.23 164.47,22.23 163.83,22.86 | v147,30.48 146.69,30.16 146.69,25.72 v147.64,24.77
  Top 0.813: 162.56,24.13 163.83,22.86 | 175.26,40.01 175.26,41.91
  Bottom 0.305: 161.93,23.5 161.29,22.86 158.75,22.86 156.84,24.77 v147.64,24.77 | 130.18,33.02 130.18,31.11 130.81,30.48 v147,30.48
  Bottom 0.813: 161.93,23.5 162.56,24.13 | 128.91,34.29 130.18,33.02
/X1  (via drill 0.41 pad 0.81)  (1 unrouted)
  Top 0.305: 95.25,5.08 95.89,5.71 95.89,12.06 101.6,17.78 101.6,18.41 | v97.47,31.11 99.69,31.11 100.33,30.48 100.33,24.77 101.6,23.5 101.6,22.23 | v92.71,31.11 92.71,38.1 95.25,40.64 95.25,45.09 96.52,46.35 96.52,50.16
  Top 0.813: 101.6,18.41 101.6,20.32 101.6,22.23 | 96.52,50.16 96.52,52.07 | 93.98,3.81 95.25,5.08
  Bottom 0.305: v97.47,31.11 v92.71,31.11
D0
  Top 0.305: 16.51,5.08 16.51,10.79 28.57,22.86 28.57,32.38 31.11,34.92 31.11,55.24 30.48,55.88 29.21,55.88 28.57,56.52 28.57,60.33 27.94,60.96 27.94,66.04 28.57,66.67 28.57,70.48 29.21,71.12 30.48,71.12 31.11,71.75 31.11,83.19 35.56,87.63
  Top 0.813: 35.56,87.63 37.47,87.63 | 17.78,3.81 16.51,5.08
D1
  Top 0.305: 17.78,8.26 17.78,10.79 29.21,22.23 29.21,31.75 31.75,34.29 31.75,57.78 31.11,58.42 31.11,60.33 30.48,60.96 29.21,60.96 28.57,61.59 28.57,65.41 29.21,66.04 30.48,66.04 31.11,66.67 31.11,68.58 31.75,69.22 31.75,81.28 35.56,85.09
  Top 0.813: 35.56,85.09 37.47,85.09 | SV1. 17.78,8.26
D2
  Top 0.305: 19.05,5.08 19.05,10.79 29.84,21.59 29.84,31.11 32.38,33.66 32.38,58.42 31.75,59.05 31.75,60.96 31.11,61.59 29.84,61.59 29.21,62.23 29.21,64.77 29.84,65.41 31.11,65.41 31.75,66.04 31.75,67.94 32.38,68.58 32.38,79.38 35.56,82.55
  Top 0.813: 35.56,82.55 37.47,82.55 | 20.32,3.81 19.05,5.08
D3
  Top 0.305: 20.32,8.26 20.32,10.79 30.48,20.95 30.48,30.48 33.02,33.02 33.02,59.05 32.7,59.37 32.7,67.63 33.02,67.94 33.02,77.47 35.56,80.01
  Top 0.813: 35.56,80.01 37.47,80.01 | 20.32,6.35 20.32,8.26
D4
  Top 0.305: 21.59,5.08 21.59,10.79 31.11,20.32 31.11,29.84 33.66,32.38 33.66,59.69 33.34,60.01 33.34,66.99 33.66,67.31 33.66,76.2 34.92,77.47 35.56,77.47
  Top 0.813: 35.56,77.47 37.47,77.47 | 22.86,3.81 21.59,5.08
D5
  Top 0.305: 22.86,8.26 22.86,10.79 31.75,19.68 31.75,29.21 34.29,31.75 34.29,60.33 33.97,60.64 33.97,66.36 34.29,66.67 34.29,74.3 34.92,74.93 35.56,74.93
  Top 0.813: 35.56,74.93 37.47,74.93 | 22.86,6.35 22.86,8.26
D6
  Top 0.305: 24.13,5.08 24.13,10.79 32.38,19.05 32.38,28.57 34.92,31.11 34.92,60.96 34.61,61.28 34.61,65.72 34.92,66.04 34.92,71.75 35.56,72.39
  Top 0.813: 35.56,72.39 37.47,72.39 | 25.4,3.81 24.13,5.08
D7
  Top 0.305: 25.4,8.26 25.4,10.79 33.02,18.41 33.02,27.94 35.56,30.48 35.56,59.69 38.1,62.23 38.1,64.77 35.56,67.31 35.56,69.22 36.2,69.85
  Top 0.813: 36.2,69.85 37.47,69.85 | 25.4,6.35 25.4,8.26
ETX1  (via drill 0.41 pad 0.81)
  Top 0.305: 38.73,41.91 39.37,41.27 v39.37,36.83
  Top 0.813: 38.73,41.91 37.47,41.91
  Bottom 0.305: 103.5,33.66 102.87,33.02 82.87,33.02 78.42,37.47 66.04,37.47 64.77,38.73 49.53,38.73 49.21,38.42 44.13,38.42 43.18,37.47 40.01,37.47 v39.37,36.83
  Bottom 0.813: 103.5,33.66 104.14,34.29
EXD  (via drill 0.41 pad 0.81)
  Top 0.305: 93.98,36.2 93.98,38.1 96.52,40.64 | 36.83,5.08 36.83,13.02 38.73,14.92 38.73,28.57 42.55,32.38 42.55,38.42 v42.86,38.73
  Top 0.813: 38.1,3.81 36.83,5.08 | 96.52,40.64 96.52,41.91 | 93.98,34.29 93.98,36.2
  Bottom 0.305: 27.94,39.37 26.67,40.64 10.79,40.64 10.16,41.27 | 91.44,34.29 93.98,34.29 | 89.53,34.29 82.55,34.29 78.74,38.1 66.36,38.1 65.09,39.37 49.21,39.37 48.9,39.05 43.18,39.05 v42.86,38.73 38.73,38.73 38.1,38.1 36.83,38.1 35.56,39.37 31.75,39.37
  Bottom 0.813: 10.16,41.27 10.16,43.18 | 27.94,39.37 29.84,39.37 31.75,39.37 | 93.98,34.29 91.44,34.29 89.53,34.29
F16  (via drill 0.41 pad 0.81)
  Top 0.305: 74.93,5.08 74.93,9.21 v74.61,9.53 | v132.08,9.21 132.08,22.86 132.72,23.5 132.72,28.57 135.25,31.11 135.25,38.73 137.79,41.27 137.79,58.42 140.34,60.96 v140.34,68.58 | v131.44,78.74 131.44,77.47 130.18,76.2 | v145.41,69.22 145.73,69.53 145.73,71.75 146.05,72.07 146.05,77.15 v145.73,77.47
  Top 0.813: 76.2,3.81 74.93,5.08 | 130.18,76.2 128.91,74.93
  Bottom 0.305: v74.61,9.53 74.93,9.21 129.86,9.21 130.18,8.89 131.76,8.89 v132.08,9.21 | v131.44,78.74 144.46,78.74 v145.73,77.47 | v140.34,68.58 140.97,69.22 v145.41,69.22
FERR  (via drill 0.41 pad 0.81)
  Top 0.305: v101.6,87.31 101.6,85.09 | 78.74,102.87 83.19,98.42 83.19,91.12 82.87,90.81 82.87,89.53 83.19,89.22 83.19,86.04 v83.5,85.72 83.19,85.41 83.19,72.39 82.23,71.44 82.23,69.22 82.55,68.9 82.55,65.09 82.23,64.77 82.23,62.55 83.19,61.59 83.19,55.88 82.55,55.24 82.55,44.77 83.19,44.13 83.19,40.64 82.87,40.32 82.87,39.05 83.82,38.1 83.82,34.92 81.28,32.38 81.28,13.02 v80.01,11.75
  Top 0.813: 78.74,102.87 78.74,104.14 | v101.6,87.31 101.6,85.09
  Bottom 0.305: v83.5,85.72 90.17,85.72 90.81,86.36 93.34,86.36 93.98,87 101.28,87 v101.6,87.31 | v80.01,11.75 79.38,11.11 76.52,11.11 75.56,12.06 41.27,12.06 40.64,11.43 38.1,11.43 34.29,7.62 34.29,5.08
  Bottom 0.813: 33.02,3.81 34.29,5.08
GND  (via drill 0.41 pad 0.81)  (1 unrouted)
  Top 0.305: 59.69,36.2 59.69,40.01 | v131.44,46.99 131.44,44.45 | v128.91,97.79 128.91,102.87 125.73,106.05 J2. | v93.98,46.99 93.98,44.45 v93.98,46.99 | v101.6,46.99 101.6,44.45 v101.6,46.99
  Top 0.61: v38.73,96.52 38.73,99.06 40.64,100.97 40.64,104.14 42.55,106.05 42.55,113.03 41.27,114.3 40.64,114.3 | 81.28,3.81 81.28,6.35 81.28,8.89 83.82,11.43 83.82,20.32 | 83.82,104.14 85.72,106.05 85.72,113.03 84.45,114.3 83.82,114.3
  Top 0.813: 22.86,86.36 24.77,86.36 24.77,76.2 | 24.77,76.2 22.86,76.2 | 24.77,66.04 24.77,76.2 | 24.77,66.04 22.86,66.04 | 24.77,55.88 24.77,66.04 | 24.77,55.88 22.86,55.88 | 24.77,45.72 24.77,55.88 | 24.77,45.72 22.86,45.72 | 24.77,35.56 24.77,45.72 | 24.77,35.56 22.86,35.56 | 24.77,25.4 24.77,35.56 | 24.77,25.4 22.86,25.4 | 67.31,85.09 69.22,85.09 69.22,74.93 | 69.22,74.93 67.31,74.93 | 69.22,64.77 v69.22,67.63 69.22,74.93 | 69.22,64.77 67.31,64.77 | 69.22,54.61 69.22,58.1 | 69.22,58.1 69.22,64.77 | 69.22,54.61 67.31,54.61 | 69.22,54.61 71.75,54.61 71.75,44.45 | 71.75,44.45 69.85,44.45 | 71.75,34.29 71.75,44.45 | 71.75,34.29 69.85,34.29 | 71.75,34.29 74.3,31.75 74.3,26.67 72.39,24.77 72.39,20.32 | 108.58,34.29 106.68,34.29 | 108.58,34.29 108.58,44.45 | 108.58,44.45 106.68,44.45 | 108.58,44.45 108.58,54.61 | 108.58,54.61 106.68,54.61 | 108.58,54.61 108.58,64.77 | 108.58,64.77 106.68,64.77 | 108.58,64.77 v108.58,66.99 108.58,74.93 | 108.58,74.93 106.68,74.93 | 108.58,74.93 108.58,85.09 | 108.58,85.09 106.68,85.09 | 108.58,85.09 v108.58,88.27 108.58,95.25 109.22,95.89 109.22,97.79 | 108.58,34.29 108.58,20.32 106.68,20.32 | 143.51,24.13 141.6,24.13 | 143.51,24.13 143.51,34.29 | 143.51,34.29 141.6,34.29 | 143.51,34.29 143.51,44.45 | 143.51,44.45 141.6,44.45 | 143.51,44.45 143.51,54.61 | 143.51,54.61 141.6,54.61 | 143.51,54.61 143.51,64.77 | 143.51,64.77 141.6,64.77 | 143.51,64.77 v143.51,67.94 143.51,74.93 | 143.51,74.93 141.6,74.93 | 143.51,74.93 143.51,85.09 | 143.51,85.09 141.6,85.09 | 143.51,85.09 143.51,95.25 141.6,95.25 | 177.16,24.13 175.26,24.13 | 177.16,34.29 177.16,24.13 | 177.16,34.29 175.26,34.29 | 177.16,44.45 177.16,34.29 | 177.16,44.45 175.26,44.45
  Top 0.813: 177.16,54.61 177.16,44.45 | 177.16,64.77 177.16,54.61 | 177.16,74.93 177.16,64.77 | 177.16,85.09 177.16,74.93 | 177.16,85.09 177.16,95.25 175.26,95.25 | 175.26,85.09 177.16,85.09 | 177.16,74.93 175.26,74.93 | 177.16,64.77 175.26,64.77 | 177.16,54.61 175.26,54.61 | 177.16,24.13 v177.16,17.78 | v143.51,17.78 143.51,24.13 | 24.77,25.4 24.77,20.95 v19.68,15.88 v18.41,14.61 v17.14,13.34 | 59.69,40.01 59.69,41.91 | 59.69,34.29 59.69,36.2 | v131.44,46.99 131.44,44.45 | 69.22,58.1 v70.8,58.1
  Bottom 0.305: 46.99,46.99 66.04,46.99 66.67,46.35 69.22,46.35 69.85,45.72 69.85,44.45 | v70.8,58.1 70.17,58.1 69.85,57.78 49.53,57.78 48.9,57.15 46.99,57.15 | v69.22,67.63 48.26,67.63 47.94,67.31 46.99,67.31 | v108.58,88.27 88.9,88.27 88.27,87.63 86.36,87.63 | v108.58,66.99 99.06,66.99 98.74,67.31 86.36,67.31 | 86.36,57.15 87.63,57.15 88.27,56.52 101.6,56.52 102.23,55.88 105.41,55.88 106.05,55.24 | 26.67,15.88 26.67,5.08 27.94,3.81 29.21,5.08 29.21,15.88 | 128.91,102.87 131.44,102.87 | 47.62,20.32 44.77,20.32 44.61,20.48 | 165.1,87.63 165.1,85.09 | 172.72,85.09 175.26,85.09 | J2. 127.64,113.67 128.91,113.67 130.81,115.57 | 46.99,36.83 52.07,36.83 53.34,35.56 58.42,35.56 59.69,34.29 60.96,35.56 68.58,35.56 69.85,34.29
  Bottom 0.61: 2.54,38.1 20.32,38.1 22.86,35.56 28.57,35.56 29.84,36.83 | 22.86,25.4 20.32,27.94 2.54,27.94 2.54,26.67 J3. | 2.54,48.26 20.32,48.26 22.86,45.72 | 2.54,58.42 20.32,58.42 22.86,55.88 | 2.54,68.58 20.32,68.58 22.86,66.04 29.84,66.04 | 2.54,78.74 20.32,78.74 22.86,76.2 | 22.86,88.9 2.54,88.9 | v38.73,96.52 34.92,96.52 32.38,93.98 26.04,93.98 22.86,90.81 22.86,88.9 | 46.99,77.47 64.77,77.47 67.31,74.93 | 46.99,87.63 49.53,87.63 50.16,87 65.41,87 67.31,85.09 | 83.82,104.14 81.28,106.68 57.15,106.68 40.64,106.68 | 90.17,100.33 106.68,100.33 109.22,97.79 | 86.36,77.47 104.14,77.47 106.68,74.93 | 86.36,46.99 v93.98,46.99 v101.6,46.99 104.14,46.99 106.68,44.45 | 86.36,36.83 104.14,36.83 106.68,34.29 | 121.28,97.79 v128.91,97.79 139.06,97.79 141.6,95.25 | 121.28,87.63 139.06,87.63 141.6,85.09 | 121.28,77.47 122.56,77.47 123.19,76.83 139.7,76.83 141.6,74.93 | v143.51,67.94 141.6,67.94 140.97,67.31 121.28,67.31 | 121.28,57.15 128.27,57.15 128.91,56.52 131.44,56.52 132.08,57.15 140.34,57.15 141.6,55.88 141.6,54.61 | 121.28,46.99 v131.44,46.99 139.06,46.99 141.6,44.45 | 121.28,26.67 121.92,26.04 139.7,26.04 141.6,24.13 | 121.28,36.83 139.06,36.83 141.6,34.29 | 152.4,26.67 156.84,26.67 157.48,26.04 173.35,26.04 175.26,24.13 | 152.4,36.83 172.72,36.83 175.26,34.29 | 152.4,46.99 164.47,46.99 165.1,47.62 172.09,47.62 175.26,44.45 | 152.4,57.15 172.72,57.15 175.26,54.61 | 152.4,67.31 172.72,67.31 175.26,64.77 | 152.4,77.47 153.67,78.74 165.1,78.74 165.74,78.11 172.09,78.11 175.26,74.93 | 152.4,97.79 172.72,97.79 175.26,95.25 | 152.4,87.63 165.1,87.63 172.72,87.63 175.26,85.09 | 29.84,66.04 29.84,67.31
  Bottom 0.61: 29.84,66.04 29.84,64.77 31.11,63.5 | 22.86,86.36 22.86,88.9 | 40.64,104.14 40.64,106.68 | 40.64,106.68 13.97,106.68
  Bottom 0.813: 77.47,20.32 77.47,21.59 78.11,22.23 104.78,22.23 106.68,20.32 112.39,20.32 114.94,17.78 v143.51,17.78 v177.16,17.78 | 77.47,20.32 72.39,20.32 70.48,22.23 46.35,22.23 45.72,21.59 44.61,20.48 41.91,17.78 32.38,17.78 30.48,15.88 29.21,15.88 26.67,15.88 v19.68,15.88 v18.41,14.61 v17.14,13.34 | 77.47,20.32 83.82,20.32 | 47.62,20.32 49.53,20.32 | 106.68,54.61 106.05,55.24 | 128.91,102.87 131.44,102.87
  pour Bottom (isolate 0.356): 1.27,124.46 9.53,124.46 9.53,119.38 98.42,119.38 98.42,124.46 180.34,124.46 180.34,1.27 1.27,1.27
  pour Top (isolate 0.356): 1.27,1.27 1.27,124.46 9.53,124.46 9.53,119.38 98.42,119.38 98.42,124.46 180.34,124.46 180.34,1.27
HI  (via drill 0.41 pad 0.81)
  Top 0.305: 20.32,95.89 20.32,97.79 17.78,100.33 17.78,102.87 | 168.91,93.98 168.91,97.16 172.72,100.97 | 171.45,83.82 171.45,88.9 168.91,91.44 | 167.64,76.83 167.64,77.47 170.18,80.01 170.18,80.64 | 168.91,73.66 168.91,63.5 | 160.02,76.83 160.02,77.47 162.56,80.01 162.56,80.64 | 167.64,56.52 167.64,57.78 170.18,60.33 | 167,54.61 165.74,53.34 164.47,53.34 163.83,52.7 163.83,33.02 | 60.96,106.05 v60.96,108.58 | v17.78,108.58 17.78,105.41 | 135.25,93.98 135.25,101.6 | 126.36,85.09 128.91,82.55 128.91,76.83 127.64,75.56 127.64,63.5 | 136.53,44.45 136.53,41.91 | 139.06,44.45 139.06,41.91 | 139.06,46.35 139.06,50.16 | 52.07,75.56 52.07,76.2 52.7,76.83 52.7,80.64 53.34,81.28 | 53.34,83.82 53.34,89.53 53.98,90.17 53.98,91.44 53.34,92.08 53.34,96.52 60.96,104.14 | 99.06,87 99.06,90.17 100.97,92.08 | 126.36,56.52 128.91,59.05 128.91,60.33 | 127.64,86.36 128.91,87.63 128.91,90.81 | 124.46,45.09 125.09,45.72 125.09,53.34 | 62.23,40.01 62.23,39.37 63.5,38.1 63.5,24.13 62.23,22.86 62.23,22.23 | 62.23,44.45 62.23,41.91 | 59.69,66.67 59.69,70.48 60.96,71.75 60.96,73.66 | v78.42,50.8 78.42,49.21 78.11,48.9 78.11,45.4 78.42,45.09 v78.42,41.27 | 66.04,53.34 66.04,56.52 63.5,59.05 63.5,63.5
  Top 0.813: 172.72,100.97 172.72,102.87 | 168.91,93.98 167.64,92.71 168.91,91.44 | 171.45,83.82 170.18,82.55 170.18,80.64 | 162.56,82.55 162.56,80.64 | 160.02,76.83 160.02,74.93 | 167.64,76.83 167.64,74.93 168.91,73.66 | 163.83,33.02 162.56,31.75 | 167.64,56.52 167.64,54.61 167,54.61 | 170.18,60.33 170.18,62.23 168.91,63.5 | 20.32,95.89 20.32,93.98 | 17.78,102.87 17.78,104.14 17.78,105.41 | 60.96,104.14 60.96,106.05 | 53.34,83.82 54.61,82.55 53.34,81.28 | 52.07,74.93 52.07,75.56 | 60.96,73.66 59.69,74.93 | 63.5,63.5 62.23,64.77 | 59.69,64.77 59.69,66.67 | 67.31,52.07 66.04,53.34 | 62.23,44.45 62.23,41.91 62.23,40.01 | 62.23,22.23 62.23,20.32 | 99.06,87 99.06,85.09 | 101.6,92.71 100.97,92.08 | 135.25,101.6 133.99,102.87 | 136.53,92.71 135.25,93.98 | 128.91,90.81 128.91,92.71 | 127.64,86.36 126.36,85.09 128.91,82.55 | 127.64,63.5 128.91,62.23 128.91,60.33 | 126.36,56.52 126.36,54.61 125.09,53.34 | 139.06,50.16 139.06,52.07 | 124.46,45.09 123.83,44.45 | 136.53,44.45 136.53,41.91 | 139.06,41.91 139.06,44.45 139.06,46.35
  Bottom 0.305: 169.54,81.92 168.91,81.28 163.83,81.28 163.19,81.92 | 161.93,81.92 161.29,81.28 154.31,81.28 153.67,80.64 147.32,80.64 144.15,83.82 135.25,83.82 | 162.56,31.75 165.1,31.75 | v60.96,108.58 v17.78,108.58 | 135.89,92.08 135.25,91.44 130.18,91.44 129.54,92.08 | 128.91,82.55 131.44,82.55 133.99,85.09 | 136.53,44.45 139.06,44.45 | 124.46,45.09 125.09,45.72 135.25,45.72 135.89,45.09 | 62.23,64.77 59.69,64.77 | 66.04,43.18 63.5,43.18 | 60.96,43.18 53.34,43.18 | 128.27,92.08 127.64,91.44 125.73,91.44 122.87,94.3 120.02,94.3 117.79,92.08 115.89,92.08 115.25,91.44 102.87,91.44 102.23,92.08 | 59.69,20.32 62.23,20.32 64.77,20.32 67.31,20.32 | 95.89,19.68 94.61,18.41 81.6,18.41 80.96,19.05 79.06,19.05 78.42,18.41 69.22,18.41 67.94,19.68 | 95.25,53.34 107.31,53.34 110.49,56.52 118.11,56.52 120.02,54.61 124.46,54.61 | 59.05,74.93 57.78,73.66 53.34,73.66 | 137.79,53.34 135.25,53.34 | 92.71,50.8 88.27,50.8 87.63,50.16 85.09,50.16 84.45,50.8 v78.42,50.8 73.03,50.8 70.48,53.34 69.22,53.34 67.94,52.07 | 31.75,59.69 33.66,61.59 33.66,64.14 35.56,66.04 45.72,66.04 46.35,65.41 48.9,65.41 49.53,66.04 58.42,66.04 59.05,65.41 | 67.31,43.81 68.58,42.55 68.58,41.27 69.22,40.64 77.79,40.64 v78.42,41.27
  Bottom 0.813: 170.18,82.55 169.54,81.92 | 162.56,31.75 165.1,31.75 | 31.75,59.69 29.84,59.69 | 53.34,73.66 52.07,74.93 | 59.69,74.93 59.05,74.93 | 59.05,65.41 59.69,64.77 62.23,64.77 | 67.94,52.07 67.31,52.07 | 60.96,43.18 62.23,44.45 63.5,43.18 | 66.67,43.81 67.31,44.45 67.31,43.81 66.67,43.81 | 66.67,43.81 66.04,43.18 | 53.34,43.18 52.07,44.45 | 67.94,19.68 67.31,20.32 64.77,20.32 62.23,20.32 59.69,20.32 | 102.23,92.08 101.6,92.71 | 92.71,50.8 93.98,52.07 95.25,53.34 | 95.89,19.68 96.52,20.32 | 123.83,44.45 124.46,45.09 | 135.89,45.09 136.53,44.45 139.06,44.45 | 126.36,54.61 124.46,54.61 | 135.25,53.34 133.99,54.61 | 139.06,52.07 137.79,53.34 | 128.91,82.55 131.44,82.55 133.99,85.09 135.25,83.82 | 135.89,92.08 136.53,92.71 | 162.56,82.55 161.93,81.92 163.19,81.92 162.56,82.55 | 128.91,92.71 128.27,92.08 129.54,92.08 128.91,92.71
IS4  (via drill 0.41 pad 0.81)  (1 unrouted)
  Top 0.305: v133.99,27.94 133.99,26.04 | v147.96,26.99 148.59,27.62 148.59,39.37 147.96,40.01 v147.96,44.13 | v118.75,32.38 v118.75,28.26 | v45.09,33.97 45.09,40.64 44.45,41.27 44.45,48.9 45.09,49.53 45.09,51.75 v44.77,52.07
  Top 0.813: 133.99,26.04 133.99,24.13
  Bottom 0.305: v147.96,44.13 148.27,44.45 158.12,44.45 | v147.96,26.99 146.37,26.99 144.78,28.57 137.79,28.57 137.16,27.94 v133.99,27.94 133.35,27.3 126.36,27.3 125.09,28.57 123.19,28.57 122.87,28.26 120.65,28.26 | 120.65,28.26 119.7,28.26 | v118.75,28.26 120.65,28.26 | v118.75,32.38 113.35,32.38 112.08,31.11 99.06,31.11 97.79,29.84 90.81,29.84 89.53,31.11 65.41,31.11 65.09,31.43 59.69,31.43 58.74,32.38 51.12,32.38 49.21,34.29 45.4,34.29 v45.09,33.97 | v44.77,52.07 44.77,53.02 46.35,54.61 49.53,54.61
  Bottom 0.813: 158.12,44.45 160.02,44.45 | 49.53,54.61 52.07,54.61
N$1
  Top 0.305: 20.32,57.78 20.32,61.59
  Top 0.813: 20.32,61.59 20.32,63.5 | 20.32,55.88 20.32,57.78
N$2
  Top 0.305: 20.32,47.62 20.32,51.44
  Top 0.813: 20.32,45.72 20.32,47.62 | 20.32,51.44 20.32,53.34
N$3
  Top 0.305: 20.32,37.47 20.32,41.27
  Top 0.813: 20.32,35.56 20.32,37.47 | 20.32,41.27 20.32,43.18
N$4
  Bottom 0.813: 15.24,43.18 17.78,43.18
N$5
  Bottom 0.813: 15.24,53.34 17.78,53.34
N$6
  Bottom 0.813: 15.24,63.5 17.78,63.5
N$7
  Top 0.305: 20.32,67.94 20.32,71.75
  Top 0.813: 20.32,66.04 20.32,67.94 | 20.32,71.75 20.32,73.66
N$8
  Bottom 0.813: 15.24,73.66 17.78,73.66
N$9
  Top 0.305: 20.32,78.11 20.32,81.92
  Top 0.813: 20.32,76.2 20.32,78.11 | 20.32,81.92 20.32,83.82
N$10
  Top 0.813: 15.24,83.82 17.78,83.82
N$11
  Bottom 0.305: 96.52,34.29 99.06,34.29
  Bottom 0.813: 96.52,34.29 99.06,34.29
N$12  (via drill 0.41 pad 0.81)
  Top 0.305: v150.5,95.89 v150.5,69.22 | v118.75,88.9 118.75,96.52 118.43,96.84 118.43,98.11 118.75,98.42 v118.75,103.5
  Bottom 0.305: 173.99,71.12 173.04,70.17 163.51,70.17 162.88,69.53 150.81,69.53 v150.5,69.22 | v150.5,95.89 144.78,101.6 125.09,101.6 121.92,104.78 120.02,104.78 v118.75,103.5 | 104.78,74.93 106.05,73.66 109.22,73.66 116.84,81.28 116.84,87 v118.75,88.9
  Bottom 0.813: 173.99,71.12 175.26,72.39 | 104.14,74.93 104.78,74.93
N$13  (via drill 0.41 pad 0.81)
  Top 0.305: 54.61,87 54.61,89.53 55.88,90.81 v55.88,95.89
  Top 0.813: 54.61,85.09 54.61,87
  Bottom 0.305: 105.41,96.52 104.78,95.89 v55.88,95.89
  Bottom 0.813: 105.41,96.52 106.68,97.79
N$14
  Bottom 0.305: 79.69,72.39 83.82,72.39 85.09,71.12 89.22,71.12 89.85,70.48 97.16,70.48 97.79,71.12
  Bottom 0.813: 97.79,71.12 99.06,72.39 | 77.47,72.39 79.69,72.39
N$15
  Top 0.305: 76.2,71.12 75.88,71.44 75.88,73.03 77.47,74.61
  Top 0.813: 77.47,69.85 76.2,71.12 | 77.47,74.61 77.47,76.2
  Bottom 0.305: 165.1,72.39 167.64,72.39 | 80.64,69.85 81.28,70.48 83.82,70.48 84.45,69.85 88.58,69.85 89.22,69.22 114.94,69.22 120.02,74.3 122.56,74.3 125.73,71.12 143.51,71.12 146.69,74.3 157.48,74.3 159.38,76.2 163.19,76.2 163.83,75.56 163.83,73.66
  Bottom 0.813: 167.64,72.39 165.1,72.39 163.83,73.66 | 77.47,69.85 80.64,69.85
N$16
  Top 0.305: 165.1,36.2 165.1,39.37 166.37,40.64 166.37,52.7 167,53.34 168.28,53.34 168.91,53.98 168.91,55.88 173.99,60.96 173.99,63.5
  Top 0.813: 165.1,34.29 165.1,36.2 | 173.99,63.5 172.72,64.77
N$17  (via drill 0.41 pad 0.81)
  Top 0.305: 57.15,87 57.15,89.53 58.42,90.81 58.42,98.42 v60.96,100.97
  Top 0.813: 57.15,85.09 57.15,87
  Bottom 0.305: 106.05,104.78 105.41,104.14 86.36,104.14 85.09,102.87 83.19,102.87 81.28,100.97 v60.96,100.97
  Bottom 0.813: 106.05,104.78 106.68,105.41
N$18  (via drill 0.41 pad 0.81)
  Top 0.305: v73.34,62.55 73.34,63.82 72.71,64.45 72.71,68.26 72.07,68.9 72.07,76.2 72.71,76.83 72.71,87 72.07,87.63 v72.07,96.84
  Bottom 0.305: 98.42,97.16 97.79,96.52 72.71,96.52 72.39,96.84 v72.07,96.84 | 62.87,62.23 64.14,63.5 65.41,63.5 66.04,64.14 66.04,65.41 66.67,66.04 67.94,66.04 70.48,63.5 73.03,63.5 73.34,63.18 v73.34,62.55
  Bottom 0.813: 62.23,62.23 62.87,62.23 | 98.42,97.16 99.06,97.79
N$19  (via drill 0.41 pad 0.81)
  Top 0.305: 66.04,83.82 66.04,78.74 v67.31,77.47
  Top 0.813: 66.04,83.82 64.77,85.09
  Bottom 0.305: 102.87,81.28 100.97,79.38 89.53,79.38 89.22,79.69 80.01,79.69 79.69,79.38 74.93,79.38 73.03,77.47 v67.31,77.47
  Bottom 0.813: 102.87,81.28 104.14,82.55
N$20  (via drill 0.41 pad 0.81)
  Top 0.305: 100.33,63.5 100.33,68.58 102.87,71.12 102.87,78.74 100.33,81.28 100.33,89.53 v101.6,90.81
  Top 0.813: 99.06,62.23 100.33,63.5
  Bottom 0.305: v101.6,90.81 98.42,90.81 97.79,91.44
  Bottom 0.813: 97.79,91.44 96.52,92.71
N$21  (via drill 0.41 pad 0.81)
  Top 0.305: 95.25,83.82 95.25,88.9 97.79,91.44 97.79,100.97 100.33,103.5 100.33,106.05 100.97,106.68 102.87,106.68 103.5,106.05 | v72.07,62.55 72.07,67.94 71.44,68.58 71.44,76.52 72.07,77.15 72.07,79.69 v71.75,80.01
  Top 0.813: 96.52,82.55 95.25,83.82 | 103.5,106.05 104.14,105.41
  Bottom 0.305: 95.25,81.28 94.61,80.64 90.17,80.64 89.85,80.96 79.38,80.96 79.06,80.64 72.39,80.64 v71.75,80.01 | 65.41,62.23 66.67,63.5 67.94,63.5 68.9,62.55 v72.07,62.55
  Bottom 0.813: 64.77,62.23 65.41,62.23 | 95.25,81.28 96.52,82.55
N$22  (via drill 0.41 pad 0.81)
  Top 0.305: 170.18,76.83 170.18,78.11 v171.45,79.38 | v166.37,79.38 166.37,80.01 165.1,81.28
  Top 0.813: 165.1,81.28 165.1,82.55 | 170.18,74.93 170.18,76.83
  Bottom 0.305: v171.45,79.38 v166.37,79.38
N$24  (via drill 0.41 pad 0.81)
  Top 0.305: 53.34,73.66 53.34,78.74 55.88,81.28 v55.88,88.9 | v66.99,88.58 66.04,89.53 v66.04,100.01